# EAGLE board RFID_SHIELD (EAGLE 8.0.1)
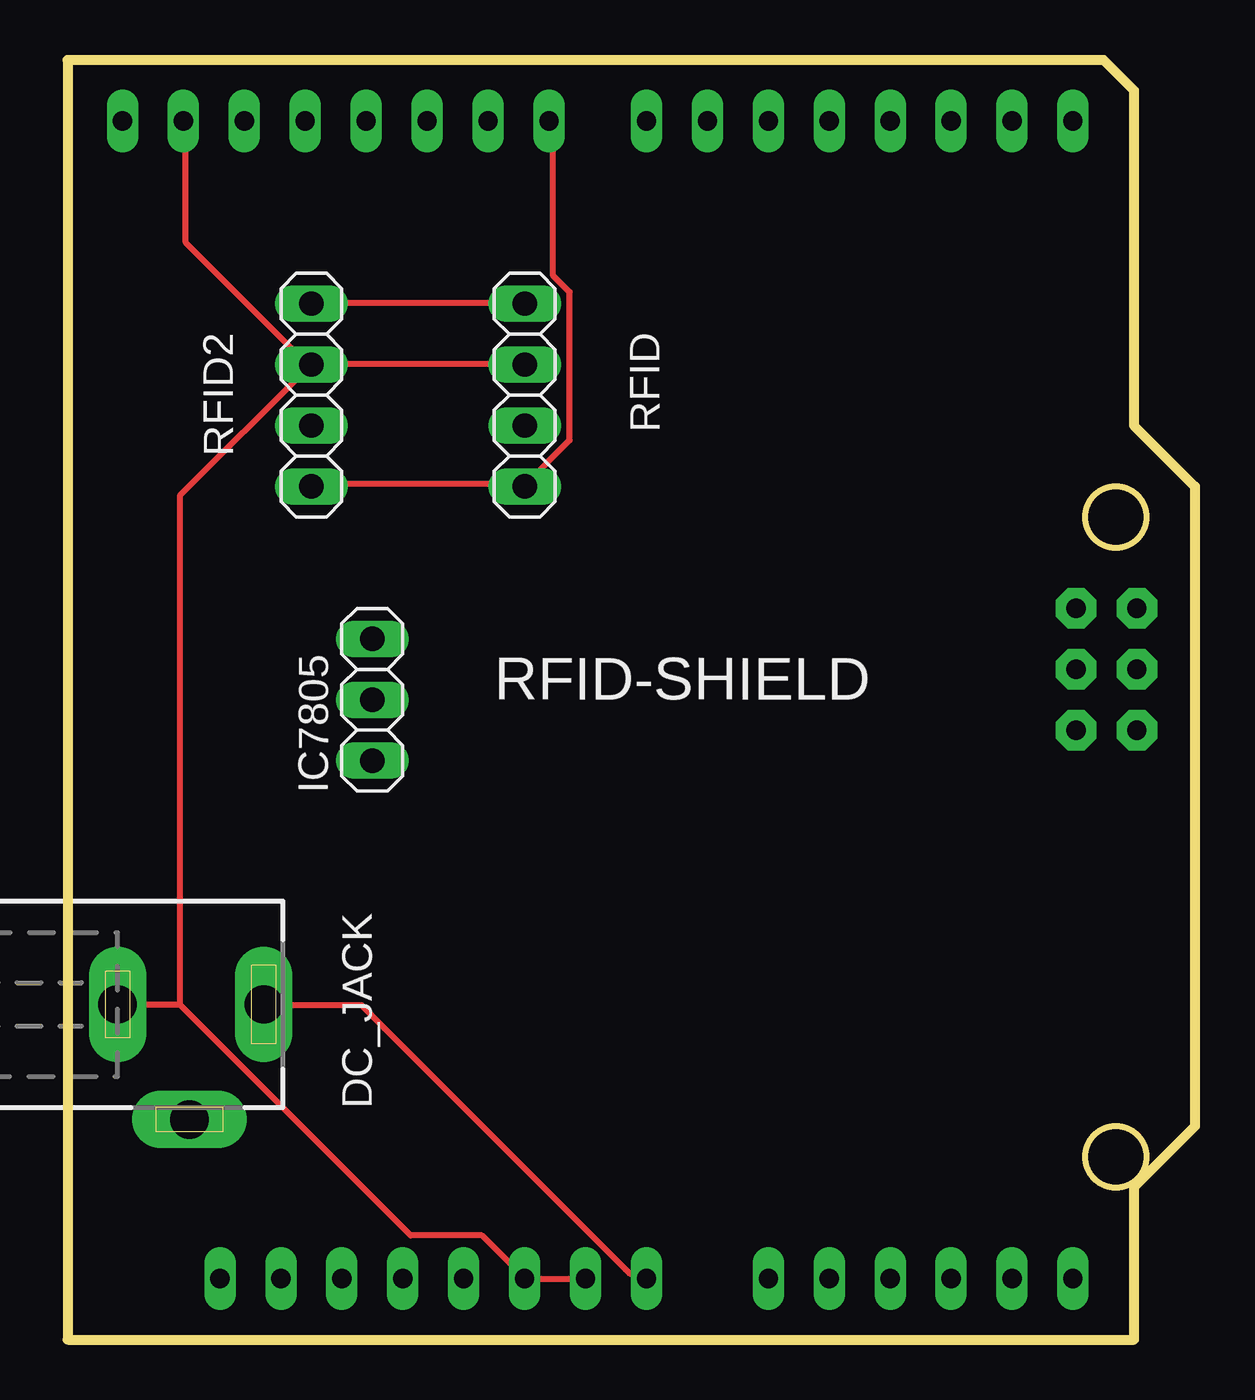
[diagram p0: board, top side]
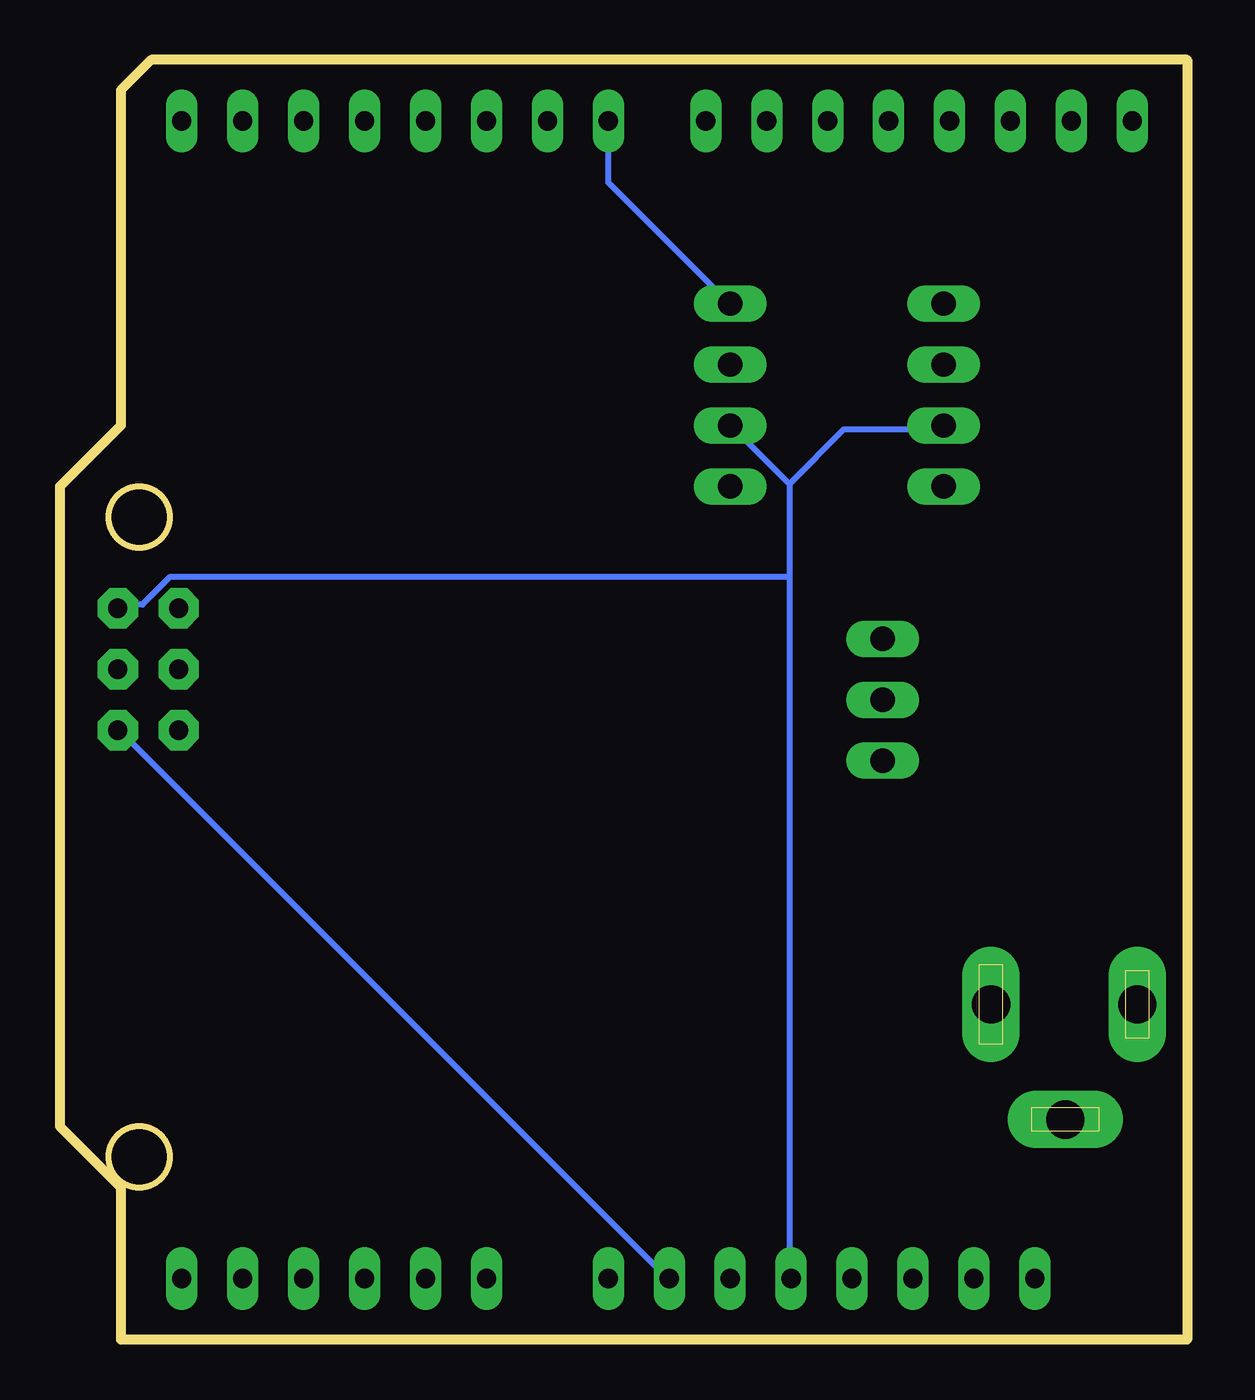
[diagram p1: board, bottom side, seen from below]

Size 46.99 x 53.34 mm. Coordinates in mm from the lower left corner, seen from the top.
Outline: circle at 43.69,7.62 radius 1.27
Outline: circle at 43.69,34.29 radius 1.27
Copper layers (1*16): Top 0.035mm / dielectric 1.5mm / Bottom 0.035mm
Design rules "default": minimum track width 10mil, minimum drill 24mil, track to track 8mil, track to pad 8mil, pad to pad 8mil, via to via 8mil, smd to smd 8mil, copper to edge 40mil, drill to drill 8mil, minimum pad ring 10mil, minimum via ring 8mil, stop-mask expansion 4mil, vias tented up to drill 0mil, thermal gap 10mil

## Footprints (pad centres in the part's own frame; a part is rotated, then mirrored left to right if it is on the bottom)
DCJ0202 = drill 1.6 pad 2 long: 1 0,3.1; 2 4.8,0; 3 0,-3
1X03 = drill 1.016 long: 1 -2.54,0; 2 0,0; 3 2.54,0
1X04 = drill 1.016 long: 1 -3.81,0; 2 -1.27,0; 3 1.27,0; 4 3.81,0
DRAGINO_SHIELD = drill 0.8 long: 2 36.83,50.8; 3 34.29,50.8; 3V3 13.97,2.54; 4 31.75,50.8; 5 29.21,50.8; 5V 16.51,2.54; 6 26.67,50.8; 7 24.13,50.8; 8 20.066,50.8; 9 17.526,50.8; 10 14.986,50.8; 11 12.446,50.8; 12 9.906,50.8; 13 7.366,50.8; A0 29.21,2.54; A1 31.75,2.54; A2 34.29,2.54; A3 36.83,2.54; A4 39.37,2.54; A5 41.91,2.54; AREF 2.286,50.8; GND@1 4.826,50.8; GND@2 21.59,2.54; GND@3 19.05,2.54; IOREF 8.89,2.54; P$32 6.35,2.54; RST 11.43,2.54; RX_1 39.37,50.8; TX_0 41.91,50.8; VIN 24.13,2.54 | drill 0.8 pad 1.676 octagon: +5V 44.577,30.481; GND 44.577,25.401; MISO 42.037,30.481; MOSI 44.577,27.941; RESET 42.037,25.401; SCK 42.037,27.941

## Placement (x,y rotation side)
DC_JACK  DCJ0202  [DCJ0202]  5.08,13.97 270 top
IC7805  7805  [1X03]  12.7,26.67 90 top
RFID  [1X04]  19.05,39.37 270 top
RFID2  [1X04]  10.16,39.37 270 top
U$1  [DRAGINO_SHIELD]  0,0 0 top

## Library data of the parts
DC_JACK = con-jack; OC_FARNELL: unknown; OC_NEWARK: unknown
IC7805 RFID RFID2 = pinhead
U$1 = Dragino_shield

## Nets
+5V: RFID2.3 RFID.3 U$1.5V U$1.+5V
EN: RFID2.1 RFID.1 U$1.7
GND: DC_JACK.3 RFID2.2 RFID.2 U$1.GND U$1.GND@1 U$1.GND@2 U$1.GND@3
TX: RFID2.4 RFID.4 U$1.8
VIN: DC_JACK.1 U$1.VIN

## Tracks (layer width: path | path; a pad name or v marks a point on that pad's centre or on a via)
+5V
  Bottom 0.254: 16.59,35.66 16.59,31.77 | 16.59,31.77 16.59,2.74 U$1.5V | 16.59,35.66 18.87,37.95 RFID.3 | 16.59,35.66 14.3,37.95 10.19,37.95 RFID2.3 | 16.59,31.77 42.42,31.77 43.56,30.63 44.48,30.63 U$1.+5V
EN
  Top 0.254: RFID2.1 10.19,43.2 18.87,43.2 RFID.1
  Bottom 0.254: U$1.7 24.13,48.23 19.1,43.2 RFID.1
GND
  Top 0.254: U$1.GND@1 4.93,50.75 4.93,45.72 9.96,40.69 RFID2.2 | RFID.2 18.87,40.69 10.19,40.69 RFID2.2 | U$1.GND@2 21.39,2.52 19.1,2.52 U$1.GND@3 18.87,2.74 17.27,4.34 14.3,4.34 4.7,13.95 | 4.7,13.95 2.18,13.95 DC_JACK.3 | 4.7,13.95 4.7,35.2 9.96,40.46 RFID2.2
  Bottom 0.254: U$1.GND 44.48,25.38 21.62,2.52 U$1.GND@2
TX
  Top 0.254: U$1.8 20.24,50.75 20.24,44.35 20.93,43.66 20.93,37.49 19.1,35.66 RFID.4 18.87,35.66 10.19,35.66 RFID2.4
VIN
  Top 0.254: U$1.VIN 24.13,2.74 23.44,2.74 12.24,13.95 8.36,13.95 DC_JACK.1

## Text on the board
tNames: RFID-SHIELD